# EAGLE board Wemos base (EAGLE 7.7.0)
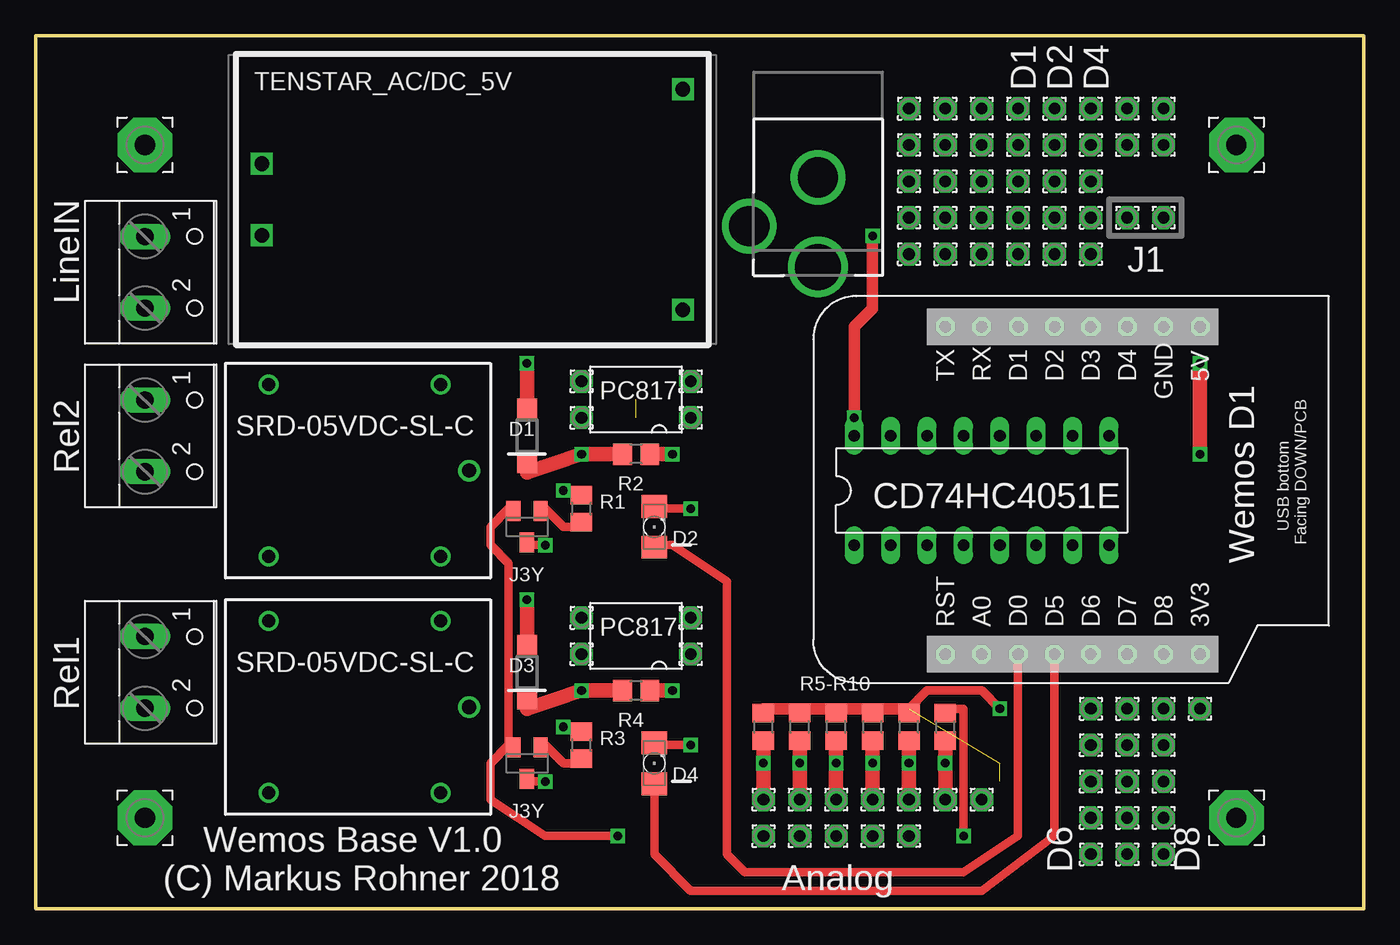
[diagram p0: board, top side]
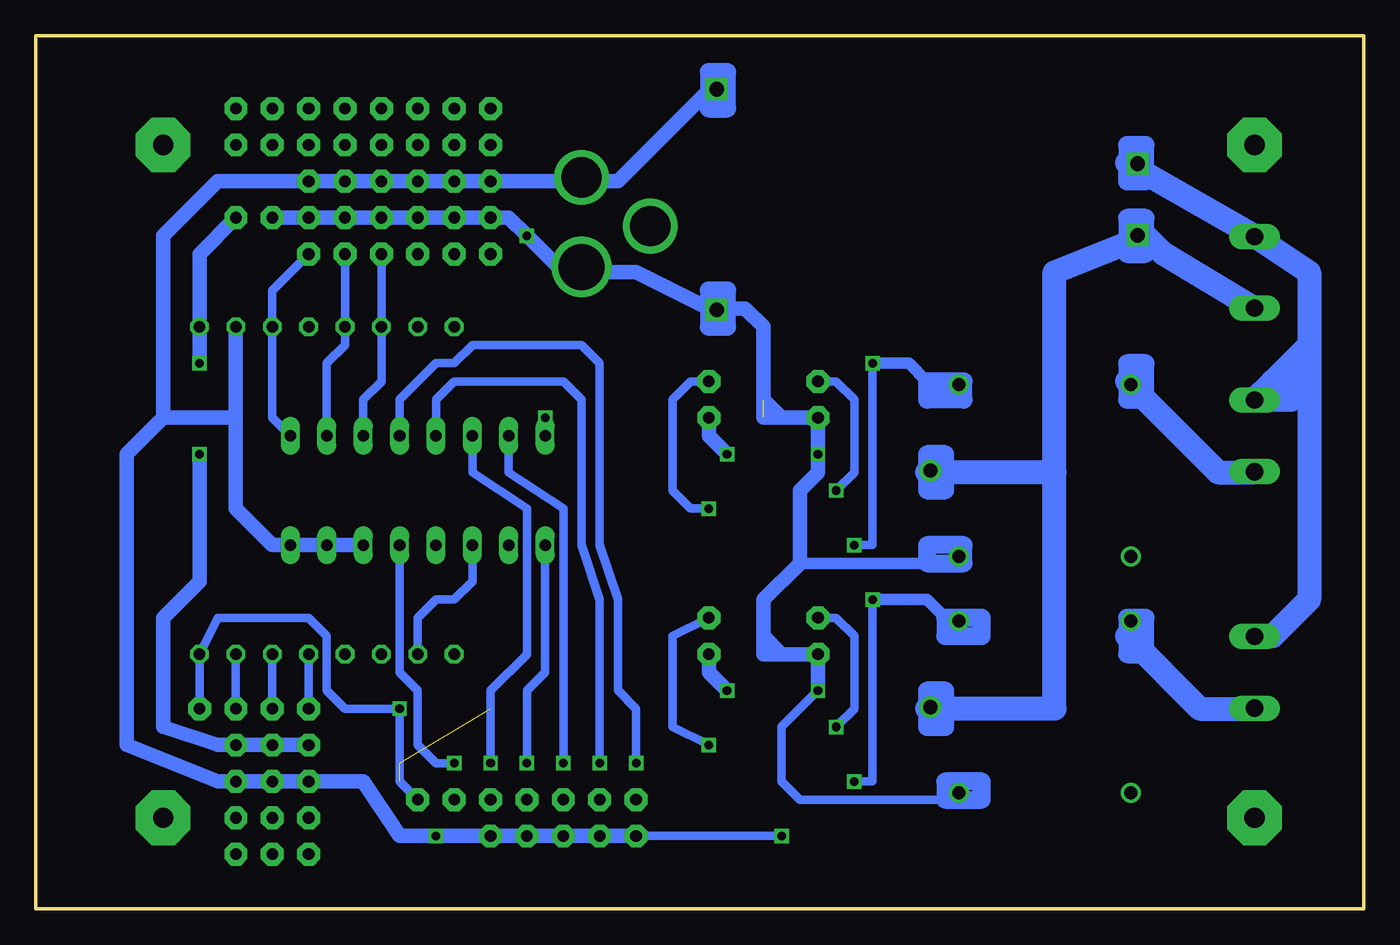
[diagram p1: board, bottom side, seen from below]

Size 92.71 x 60.96 mm. Coordinates in mm from the lower left corner, seen from the top.
Outline: 0,60.96 0,0 92.71,0 92.71,60.96 0,60.96
Copper layers (1*16): Top 0.035mm / dielectric 1.5mm / Bottom 0.035mm
Design rules "default": minimum track width 10mil, minimum drill 24mil, track to track 8mil, track to pad 8mil, pad to pad 8mil, via to via 8mil, smd to smd 8mil, copper to edge 40mil, drill to drill 8mil, minimum pad ring 10mil, minimum via ring 8mil, stop-mask expansion 4mil, vias tented up to drill 0mil, thermal gap 10mil
Milling: 4 lines

## Footprints (pad centres in the part's own frame; a part is rotated, then mirrored left to right if it is on the bottom)
DIL16 = drill 0.813 long: 1 -8.89,-3.81; 2 -6.35,-3.81; 3 -3.81,-3.81; 4 -1.27,-3.81; 5 1.27,-3.81; 6 3.81,-3.81; 7 6.35,-3.81; 8 8.89,-3.81; 9 8.89,3.81; 10 6.35,3.81; 11 3.81,3.81; 12 1.27,3.81; 13 -1.27,3.81; 14 -3.81,3.81; 15 -6.35,3.81; 16 -8.89,3.81
WEMOS = drill 0.8 octagon: 3V3 0,0; 5V 22.86,0; A0 0,15.24; D0 0,12.7; D1 22.86,12.7; D2 22.86,10.16; D3 22.86,7.62; D4 22.86,5.08; D5 0,10.16; D6 0,7.62; D7 0,5.08; D8 0,2.54; GND 22.86,2.54; RST 0,17.78; RX 22.86,15.24; TX 22.86,17.78
3,81/1,4 = drill 1.397 pad 3.81 octagon: 1 0,0
DCJACK_2MM_PTH = drill 2.8: GND 0,7.35; GNDBREAK 4.8,10.75 | drill 3.2: PWR 0,13.6
W237-102 = drill 1.194 long: 1 -2.5,-1.27; 2 2.5,-1.27
SRD-0XVDC-SL-C = drill 0.9: COIL0 -5.39,-6.12; COIL1 -5.39,5.88; SWCLOSED 6.61,5.88; SWOPEN 6.61,-6.12 | drill 1: SWCOMMON -7.39,-0.12
1,6/0,8 = drill 0.813 pad 1.6 octagon: 1 0,0
SOT23 = smd 1 x 1.4: 1 -0.95,-1.1; 2 0.95,-1.1; 3 0,1.1
DIP4 = drill 0.8: 1 -1.27,-3.81; 2 1.27,-3.81; 3 1.27,3.81; 4 -1.27,3.81
R0805 = smd 1.3 x 1.5: 1 -0.95,0; 2 0.95,0
LED_1206 = smd 1.6 x 1.803: A -1.422,0; C 1.422,0
SOD123 = smd 1.4 x 1.4: A 1.9,0; C -1.9,0
HLK-PM01 = drill 1.016 square: P$1 -14.7,2.5; P$2 -14.7,-2.5; P$3 14.7,7.7; P$4 14.7,-7.7

## Placement (x,y rotation side)
CD74H4051  [DIL16]  66.04,29.21 0 top
E$1  [WEMOS]  81.28,17.78 90 top
E$2  [3,81/1,4]  83.82,6.35 0 top
E$3  5V  [DCJACK_2MM_PTH]  54.61,58.42 180 top
E$4  [W237-102]  8.89,44.45 270 top
E$5  [SRD-0XVDC-SL-C]  22.86,13.97 180 top
E$6  [SRD-0XVDC-SL-C]  22.86,30.48 180 top
E$7  [1,6/0,8]  58.42,7.62 90 top
E$8  [W237-102]  8.89,16.51 270 top
E$9  [1,6/0,8]  68.58,45.72 90 top
E$10  [1,6/0,8]  63.5,7.62 90 top
E$11  [1,6/0,8]  50.8,5.08 90 top
E$12  [1,6/0,8]  60.96,7.62 90 top
E$13  [3,81/1,4]  7.62,6.35 0 top
E$14  [1,6/0,8]  66.04,48.26 90 top
E$15  [1,6/0,8]  73.66,11.43 90 top
E$16  [1,6/0,8]  38.1,36.83 90 top
E$17  J3Y  [SOT23]  34.29,10.16 180 top
E$18  [1,6/0,8]  55.88,7.62 90 top
E$19  J3Y  [SOT23]  34.29,26.67 180 top
E$20  [DIP4]  41.91,35.56 90 top
E$21  [1,6/0,8]  50.8,7.62 90 top
E$22  [1,6/0,8]  53.34,7.62 90 top
E$23  [1,6/0,8]  66.04,7.62 90 top
E$24  [3,81/1,4]  7.62,53.34 0 top
E$25  [R0805]  50.8,12.7 90 top
E$26  [R0805]  38.1,11.43 90 top
E$27  [R0805]  41.91,15.24 180 top
E$28  [R0805]  38.1,27.94 90 top
E$29  [R0805]  41.91,31.75 180 top
E$30  [LED_1206]  43.18,10.16 90 top
E$31  [LED_1206]  43.18,26.67 90 top
E$32  [W237-102]  8.89,33.02 270 top
E$33  [SOD123]  34.29,16.51 90 top
E$34  [SOD123]  34.29,33.02 90 top
E$35  [R0805]  53.34,12.7 90 top
E$36  [R0805]  55.88,12.7 90 top
E$37  [R0805]  58.42,12.7 90 top
E$38  [R0805]  60.96,12.7 90 top
E$39  [R0805]  63.5,12.7 90 top
E$40  [1,6/0,8]  53.34,5.08 90 top
E$41  [1,6/0,8]  55.88,5.08 90 top
E$42  [1,6/0,8]  58.42,5.08 90 top
E$43  [1,6/0,8]  60.96,5.08 90 top
E$44  [1,6/0,8]  73.66,13.97 90 top
E$45  [1,6/0,8]  81.28,13.97 90 top
E$46  [1,6/0,8]  71.12,45.72 90 top
E$47  [1,6/0,8]  73.66,8.89 90 top
E$48  [1,6/0,8]  76.2,8.89 90 top
E$49  [1,6/0,8]  78.74,8.89 90 top
E$50  [1,6/0,8]  73.66,45.72 90 top
E$51  [1,6/0,8]  73.66,48.26 90 top
E$52  [1,6/0,8]  73.66,50.8 90 top
E$53  [1,6/0,8]  76.2,11.43 90 top
E$54  [1,6/0,8]  78.74,11.43 90 top
E$55  [1,6/0,8]  71.12,48.26 90 top
E$56  [1,6/0,8]  71.12,50.8 90 top
E$57  [1,6/0,8]  68.58,50.8 90 top
E$58  [1,6/0,8]  68.58,48.26 90 top
E$59  [1,6/0,8]  63.5,48.26 90 top
E$60  [1,6/0,8]  60.96,48.26 90 top
E$61  [1,6/0,8]  66.04,50.8 90 top
E$62  [1,6/0,8]  76.2,13.97 90 top
E$63  [1,6/0,8]  78.74,13.97 90 top
E$64  [3,81/1,4]  83.82,53.34 0 top
E$65  [DIP4]  41.91,19.05 90 top
E$66  [1,6/0,8]  63.5,50.8 90 top
E$67  [1,6/0,8]  45.72,36.83 90 top
E$68  [1,6/0,8]  38.1,34.29 90 top
E$69  [1,6/0,8]  45.72,34.29 90 top
E$70  [1,6/0,8]  38.1,20.32 90 top
E$71  [1,6/0,8]  38.1,17.78 90 top
E$72  [1,6/0,8]  45.72,17.78 90 top
E$73  [1,6/0,8]  45.72,20.32 90 top
E$74  [1,6/0,8]  63.5,50.8 90 top
E$75  [1,6/0,8]  60.96,50.8 90 top
E$76  [1,6/0,8]  66.04,45.72 90 top
E$77  [1,6/0,8]  63.5,45.72 90 top
E$78  [1,6/0,8]  60.96,45.72 90 top
E$79  [1,6/0,8]  60.96,53.34 90 top
E$80  [1,6/0,8]  63.5,53.34 90 top
E$81  [1,6/0,8]  66.04,53.34 90 top
E$82  [1,6/0,8]  68.58,53.34 90 top
E$83  [1,6/0,8]  71.12,53.34 90 top
E$84  [1,6/0,8]  73.66,53.34 90 top
E$85  [1,6/0,8]  73.66,55.88 90 top
E$86  [1,6/0,8]  71.12,55.88 90 top
E$87  [1,6/0,8]  73.66,6.35 90 top
E$88  [1,6/0,8]  73.66,3.81 90 top
E$89  [1,6/0,8]  76.2,6.35 90 top
E$90  [1,6/0,8]  78.74,6.35 90 top
E$91  [1,6/0,8]  78.74,3.81 90 top
E$92  [1,6/0,8]  76.2,3.81 90 top
E$93  [1,6/0,8]  76.2,48.26 90 top
E$94  [1,6/0,8]  78.74,48.26 90 top
E$96  [1,6/0,8]  68.58,55.88 90 top
E$97  [1,6/0,8]  66.04,55.88 90 top
E$98  [1,6/0,8]  63.5,55.88 90 top
E$99  [1,6/0,8]  60.96,55.88 90 top
E$100  [1,6/0,8]  76.2,55.88 90 top
E$101  [1,6/0,8]  78.74,55.88 90 top
E$102  [1,6/0,8]  76.2,53.34 90 top
E$103  [1,6/0,8]  78.74,53.34 90 top
TENSTAR_AC/DC_5V  Tenstar AC/DC 5V  [HLK-PM01]  30.48,49.53 0 top

## Library data of the parts
CD74H4051 = 74xx-eu
E$1 = 1455413453956-wemos
E$2 E$7 E$9-E$16 E$18 E$21-E$24 E$40-E$64 E$66-E$94 E$96-E$103 = wirepad
E$3 = adafruit
E$4 E$8 E$32 = con-wago-500
E$5 E$6 = SRD-0XVDC-SL-C
E$17 E$19 = transistor-npn
E$20 E$65 = optocoupler-3-jcn
E$25-E$31 E$35-E$39 = eagle-ltspice
E$33 E$34 = diode
TENSTAR_AC/DC_5V = HLK-PM01

## Nets
3.3: E$23.1 E$45.1
GND: CD74H4051.6 E$11.1 E$47.1 E$49.1
S$3: CD74H4051.9
S$5: CD74H4051.10
S$10: CD74H4051.11
S$14: CD74H4051.3
S$16: E$20.2
S$18: E$65.2
S$19: CD74H4051.1 E$7.1
S$20: CD74H4051.12 E$21.1
S$21: CD74H4051.13 E$22.1
S$22: CD74H4051.15 E$18.1
S$24: CD74H4051.14 E$12.1
S$25: CD74H4051.5 E$10.1
S$31: E$20.3
S$32: E$65.3
S$33: E$20.1
S$34: E$65.1
S$36: E$63.1
S$38: E$15.1 E$94.1
VCC: CD74H4051.16 E$93.1

## Tracks (layer width: path | path; a pad name or v marks a point on that pad's centre or on a via)
3.3  (via drill 0.6)  (2 unrouted)
  Top 0.61: 60.96,13.97 62.23,15.24 66.04,15.24 v67.31,13.97
  Top 0.813: 50.8,13.97 60.96,13.97
  Bottom 0.61: E$23.1 67.31,8.89 v67.31,13.97 71.12,13.97 72.39,15.24 72.39,19.05 73.66,20.32 80.01,20.32 81.28,17.78 E$45.1
GND  (via drill 0.6)
  Top 0.61: v40.64,5.08 35.56,5.08 31.75,7.62 31.75,10.16 33.02,11.43 33.02,24.13 31.75,25.4 31.75,26.67 33.02,27.94 | v64.77,5.08 64.77,13.97 63.5,13.97
  Bottom 0.61: v40.64,5.08 E$11.1
  Bottom 1.016: CD74H4051.6 76.2,25.4 78.74,27.94 78.74,34.29 | 45.72,57.15 52.07,50.8 80.01,50.8 83.82,46.99 83.82,34.29 | 83.82,34.29 78.74,34.29 | 78.74,34.29 78.74,40.64 | 83.82,34.29 86.36,31.75 86.36,11.43 80.01,8.89 E$49.1 E$47.1 69.85,8.89 67.31,5.08 v64.77,5.08 E$11.1
S$1
  Bottom 1.676: 30.48,13.97 21.59,13.97 21.59,30.48 | 21.59,30.48 30.48,30.48 | 21.59,30.48 21.59,44.45 15.24,46.99 13.97,45.72 7.62,41.91
S$2
  Top 0.61: 68.58,17.78 68.58,5.08 64.77,2.54 49.53,2.54 48.26,3.81 48.26,22.86 44.45,25.4 43.18,25.4
S$3
  Bottom 0.61: CD74H4051.9 76.2,34.29 76.2,40.64 76.2,43.18 73.66,45.72
S$4
  Top 0.61: 35.56,27.94 36.83,26.67 38.1,26.67
S$5
  Bottom 0.61: CD74H4051.10 72.39,38.1 71.12,39.37 71.12,40.64 71.12,45.72
S$6
  Top 0.61: 35.56,11.43 36.83,10.16 38.1,10.16
S$8  (via drill 0.6)
  Top 0.61: 34.29,25.4 v35.56,25.4
  Top 1.016: v34.29,38.1 34.29,35.56
  Bottom 0.61: v34.29,38.1 34.29,25.4 v35.56,25.4
  Bottom 0.813: 30.48,36.83 31.75,38.1 v34.29,38.1
  Bottom 1.27: 30.48,36.83 30.48,35.56 27.94,35.56 27.94,36.83 30.48,36.83
S$9
  Bottom 1.27: 44.45,40.64 44.45,43.18 45.72,43.18 45.72,40.64 44.45,40.64
S$10
  Bottom 0.61: CD74H4051.11 69.85,35.56 68.58,36.83 68.58,40.64 68.58,45.72
S$11
  Top 0.61: 71.12,17.78 71.12,5.08 66.04,1.27 45.72,1.27 43.18,3.81 43.18,8.89
S$12
  Bottom 1.27: 15.24,50.8 15.24,53.34 16.51,53.34 16.51,50.8 15.24,50.8
S$13
  Bottom 1.27: 16.51,50.8 16.51,52.07 | 6.35,19.05 7.62,19.05
  Bottom 1.676: 16.51,52.07 7.62,46.99 3.81,44.45 3.81,39.37 | 3.81,39.37 6.35,36.83 | 3.81,39.37 3.81,21.59 6.35,19.05 | 7.62,35.56 6.35,36.83 | 6.35,36.83 5.08,36.83 6.35,35.56 5.08,35.56
S$14
  Bottom 0.61: CD74H4051.3 62.23,22.86 63.5,21.59 64.77,21.59 66.04,20.32 66.04,17.78
S$16  (via drill 0.6)
  Top 0.61: 43.18,27.94 v45.72,27.94
  Bottom 0.61: v45.72,27.94 46.99,27.94 48.26,29.21 48.26,35.56 46.99,36.83 E$20.2
S$17  (via drill 0.6)
  Top 0.61: v35.56,8.89 34.29,8.89
  Top 1.016: v34.29,21.59 34.29,19.05
  Bottom 0.61: v34.29,21.59 34.29,8.89 v35.56,8.89
  Bottom 0.813: 29.21,20.32 30.48,21.59 v34.29,21.59
  Bottom 1.27: 29.21,19.05 26.67,19.05 26.67,20.32 29.21,20.32 29.21,19.05
S$18  (via drill 0.6)
  Top 0.61: 43.18,11.43 v45.72,11.43
  Bottom 0.61: v45.72,11.43 48.26,12.7 48.26,19.05 E$65.2
S$19  (via drill 0.6)
  Top 1.016: 58.42,11.43 v58.42,10.16 E$7.1
  Bottom 0.61: CD74H4051.1 57.15,16.51 58.42,15.24 v58.42,10.16
S$20  (via drill 0.6)
  Top 1.016: 50.8,11.43 v50.8,10.16 E$21.1
  Bottom 0.61: v50.8,10.16 50.8,13.97 52.07,15.24 52.07,21.59 53.34,25.4 53.34,38.1 54.61,39.37 62.23,39.37 63.5,38.1 64.77,38.1 67.31,35.56 CD74H4051.12
S$21  (via drill 0.6)
  Top 1.016: 53.34,11.43 v53.34,10.16 E$22.1
  Bottom 0.61: v53.34,10.16 53.34,21.59 54.61,25.4 54.61,35.56 55.88,36.83 63.5,36.83 64.77,35.56 CD74H4051.13
S$22  (via drill 0.6)
  Top 1.016: 55.88,11.43 v55.88,10.16 E$18.1
  Bottom 0.61: v55.88,10.16 55.88,27.94 59.69,30.48 CD74H4051.15
S$23
  Bottom 0.61: 73.66,13.97 73.66,17.78
S$24  (via drill 0.6)
  Top 1.016: 60.96,11.43 v60.96,10.16 E$12.1
  Bottom 0.61: CD74H4051.14 62.23,30.48 58.42,27.94 58.42,17.78 60.96,15.24 v60.96,10.16
S$25  (via drill 0.6)
  Top 1.016: 63.5,11.43 v63.5,10.16 E$10.1
  Bottom 0.61: CD74H4051.5 67.31,16.51 66.04,15.24 66.04,11.43 64.77,10.16 v63.5,10.16
S$26
  Bottom 0.61: 76.2,13.97 76.2,17.78
S$28
  Bottom 1.27: 44.45,55.88 44.45,58.42 45.72,58.42 45.72,55.88 44.45,55.88
S$29
  Bottom 1.27: 16.51,45.72 15.24,45.72
S$30
  Bottom 1.27: 15.24,45.72 15.24,48.26 16.51,48.26 16.51,45.72 15.24,45.72
S$31  (via drill 0.6)
  Top 0.61: v36.83,29.21 38.1,29.21
  Bottom 0.61: E$20.3 36.83,36.83 35.56,35.56 35.56,30.48 v36.83,29.21
S$32  (via drill 0.6)
  Top 0.61: v36.83,12.7 38.1,12.7
  Bottom 0.61: E$65.3 36.83,20.32 35.56,19.05 35.56,13.97 v36.83,12.7
S$33  (via drill 0.6)
  Top 1.016: 43.18,31.75 v44.45,31.75
  Bottom 1.016: v44.45,31.75 45.72,33.02 E$20.1
S$34  (via drill 0.6)
  Top 1.016: 43.18,15.24 v44.45,15.24
  Bottom 1.016: v44.45,15.24 45.72,16.51 E$65.1
S$35
  Bottom 1.27: 29.21,29.21 29.21,31.75 30.48,31.75 30.48,29.21 29.21,29.21
S$36
  Bottom 0.61: 78.74,17.78 E$63.1
S$37
  Bottom 1.27: 15.24,35.56 15.24,38.1 16.51,38.1 16.51,36.83 16.51,35.56 15.24,35.56
  Bottom 1.676: 16.51,36.83 10.16,30.48 7.62,30.48
S$38  (via drill 0.6)
  Top 1.016: v81.28,38.1 v81.28,31.75
  Bottom 1.016: E$94.1 81.28,45.72 v81.28,38.1 | v81.28,31.75 81.28,22.86 83.82,20.32 83.82,12.7 80.01,11.43 E$15.1
S$39
  Bottom 1.27: 29.21,12.7 29.21,15.24 30.48,15.24 30.48,12.7 29.21,12.7
S$41
  Bottom 1.27: 15.24,17.78 15.24,20.32 16.51,20.32 16.51,19.05 16.51,17.78 15.24,17.78
  Bottom 1.676: 16.51,19.05 11.43,13.97 7.62,13.97
VCC  (via drill 0.6)  (1 unrouted)
  Top 0.813: v57.15,34.29 57.15,40.64 58.42,41.91 v58.42,46.99
  Top 1.016: 34.29,30.48 v38.1,31.75 40.64,31.75 | 34.29,13.97 v38.1,15.24 40.64,15.24
  Bottom 0.61: v38.1,15.24 40.64,12.7 40.64,8.89 39.37,7.62 29.21,7.62
  Bottom 0.813: 30.48,24.13 39.37,24.13
  Bottom 1.016: 41.91,35.56 40.64,34.29 | E$93.1 59.69,48.26 v58.42,46.99 55.88,44.45 50.8,44.45 45.72,41.91 43.18,41.91 41.91,40.64 41.91,34.29 38.1,34.29 v38.1,31.75 38.1,30.48 39.37,29.21 39.37,24.13 41.91,21.59 41.91,19.05 | v57.15,34.29 CD74H4051.16 | 41.91,19.05 41.91,17.78 40.64,17.78 | 40.64,17.78 41.91,19.05 | 40.64,17.78 38.1,17.78 v38.1,15.24
  Bottom 1.27: 27.94,25.4 30.48,25.4 30.48,24.13 27.94,24.13 27.94,25.4 | 29.21,8.89 29.21,7.62 26.67,7.62 26.67,8.89 29.21,8.89

## Text on the board
tNames: D1 | D2 | D4 | LineIN | J1 | Rel2 | PC817 | SRD-05VDC-SL-C | D1 | R2 | R1 | CD74HC4051E | D2 | Wemos D1 | J3Y | Rel1 | PC817 | SRD-05VDC-SL-C | D3 | R5-R10 | R4 | R3 | D4 | J3Y | D6 | D8 | Wemos Base V1.0 / (C) Markus Rohner 2018 | Analog